# EAGLE board HTVC_NOPWM (EAGLE 7.4.0)
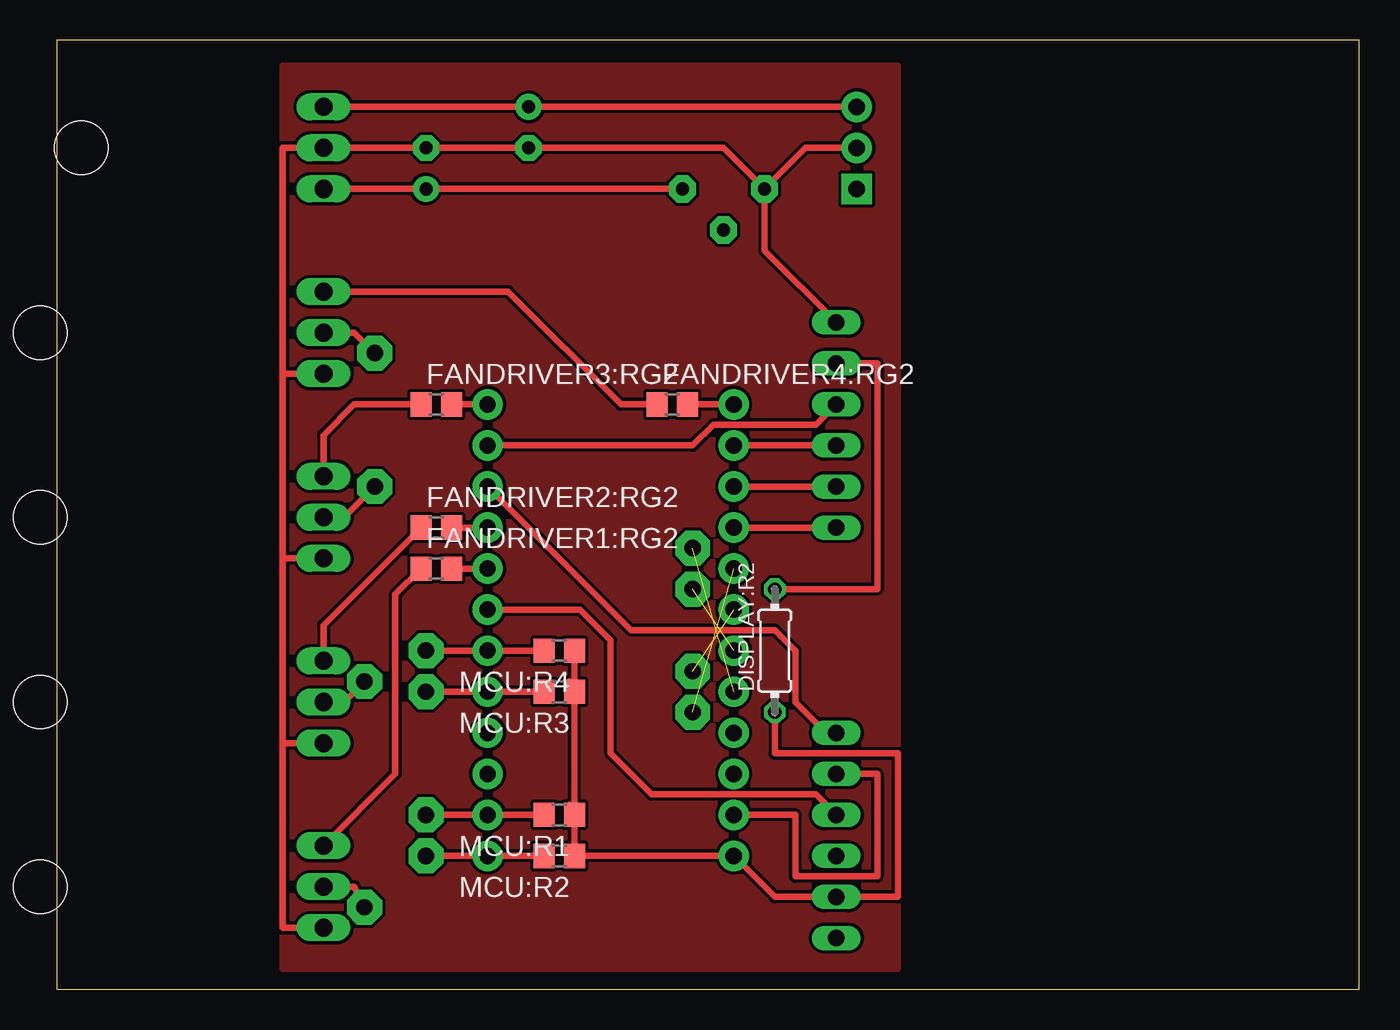
[diagram p0: board, top side]
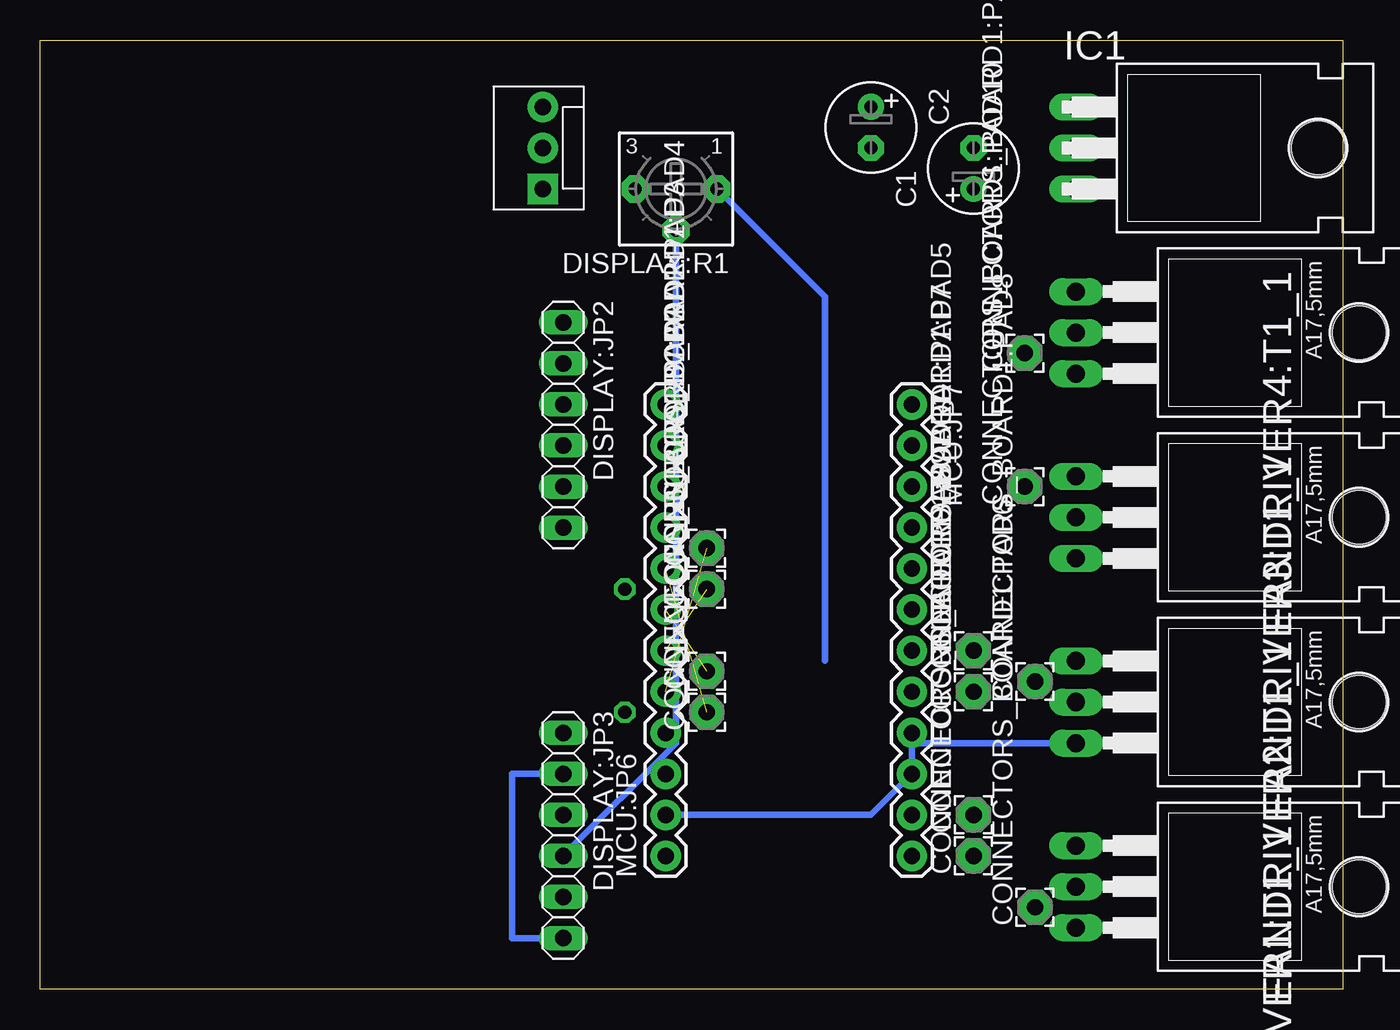
[diagram p1: board, bottom side, seen from below]

Size 80.62 x 58.73 mm. Coordinates in mm from the lower left corner, seen from the top.
Outline: 0,0 80.62,0 80.62,58.73 0,58.73 0,0
Copper layers (1*16): Top 0.035mm / dielectric 1.5mm / Bottom 0.035mm
Design rules "default *": minimum track width 10mil, minimum drill 24mil, track to track 8mil, track to pad 8mil, pad to pad 8mil, via to via 8mil, smd to smd 8mil, copper to edge 40mil, drill to drill 8mil, minimum pad ring 10mil, minimum via ring 8mil, stop-mask expansion 4mil, vias tented up to drill 0mil, thermal gap 10mil

## Footprints (pad centres in the part's own frame; a part is rotated, then mirrored left to right if it is on the bottom)
E2,5-6 = drill 0.813 pad 1.6: + -1.27,0 | drill 0.813 pad 1.6 octagon: - 1.27,0
2,15/1,0 = drill 1.016 pad 2.159 octagon: 1 0,0
1X06 = drill 1.016 long: 1 -6.35,0; 2 -3.81,0; 3 -1.27,0; 4 1.27,0; 5 3.81,0; 6 6.35,0
3362P = drill 0.813 pad 1.676 octagon: 1 -2.54,0; 2 0,2.54; 3 2.54,0
0204/7 = drill 0.813 octagon: 1 -3.81,0; 2 3.81,0
R0805 = smd 1.3 x 1.5: 1 -0.95,0; 2 0.95,0
TO220AH = drill 1.118 long: B -2.54,-6.35; C 0,-6.35; E 2.54,-6.35 | hole 3.302: 0,11.176
TO220H = drill 1.118 long: 1 -2.54,-10.16; 2 0,-10.16; 3 2.54,-10.16 | hole 3.302: 0,4.826
MOLEX-1X3 = drill 1.016 pad 1.88 square: 1 0,0 | drill 1.016 pad 1.88: 2 2.54,0; 3 5.08,0
1X12 = drill 1.016 pad 1.88: 1 0,0; 2 2.54,0; 3 5.08,0; 4 7.62,0; 5 10.16,0; 6 12.7,0; 7 15.24,0; 8 17.78,0; 9 20.32,0; 10 22.86,0; 11 25.4,0; 12 27.94,0

## Placement (x,y rotation side)
C1  0.33uF  [E2,5-6]  29.21,53.34 270 bottom
C2  0.1uF  [E2,5-6]  22.86,50.8 90 bottom
CONNECTORS_BOARD1:PAD1  [2,15/1,0]  39.37,17.14 90 bottom
CONNECTORS_BOARD1:PAD2  [2,15/1,0]  39.37,19.68 90 bottom
CONNECTORS_BOARD1:PAD3  [2,15/1,0]  39.37,24.77 90 bottom
CONNECTORS_BOARD1:PAD4  [2,15/1,0]  39.37,27.3 90 bottom
CONNECTORS_BOARD1:PAD5  [2,15/1,0]  22.86,20.95 90 bottom
CONNECTORS_BOARD1:PAD6  [2,15/1,0]  19.05,5.08 90 bottom
CONNECTORS_BOARD1:PAD7  [2,15/1,0]  22.86,18.41 90 bottom
CONNECTORS_BOARD1:PAD8  [2,15/1,0]  19.05,19.05 90 bottom
CONNECTORS_BOARD1:PAD9  [2,15/1,0]  22.86,8.26 90 bottom
CONNECTORS_BOARD1:PAD10  [2,15/1,0]  19.68,31.11 90 bottom
CONNECTORS_BOARD1:PAD11  [2,15/1,0]  22.86,10.79 90 bottom
CONNECTORS_BOARD1:PAD12  [2,15/1,0]  19.68,39.37 90 bottom
DISPLAY:JP2  [1X06]  48.26,34.92 270 bottom
DISPLAY:JP3  [1X06]  48.26,9.53 270 bottom
DISPLAY:R1  10k  [3362P]  41.27,49.53 180 bottom
DISPLAY:R2  470R  [0204/7]  44.45,20.95 90 top
FANDRIVER1:RG2  1K  [R0805]  23.5,26.04 0 top
FANDRIVER1:T1_1  TIP120  [TO220AH]  10.16,6.35 270 bottom
FANDRIVER2:RG2  1K  [R0805]  23.5,28.57 0 top
FANDRIVER2:T1_1  TIP120  [TO220AH]  10.16,17.78 270 bottom
FANDRIVER3:RG2  1K  [R0805]  23.5,36.2 0 top
FANDRIVER3:T1_1  TIP120  [TO220AH]  10.16,29.21 270 bottom
FANDRIVER4:RG2  1K  [R0805]  38.1,36.2 0 top
FANDRIVER4:T1_1  TIP120  [TO220AH]  10.16,40.64 270 bottom
IC1  7805T  [TO220H]  6.35,52.07 270 bottom
JP1  [MOLEX-1X3]  49.53,49.53 90 bottom
MCU:JP6  [1X12]  41.91,8.26 90 bottom
MCU:JP7  [1X12]  26.67,36.2 270 bottom
MCU:R1  10K  [R0805]  31.11,10.79 180 top
MCU:R2  10K  [R0805]  31.11,8.26 180 top
MCU:R3  10K  [R0805]  31.11,18.41 180 top
MCU:R4  10K  [R0805]  31.11,20.95 180 top

## Library data of the parts
C1 C2 DISPLAY:R2 FANDRIVER1:RG2 FANDRIVER2:RG2 FANDRIVER3:RG2 FANDRIVER4:RG2 MCU:R1-MCU:R4 = rcl
CONNECTORS_BOARD1:PAD1-CONNECTORS_BOARD1:PAD12 = wirepad
DISPLAY:JP2 DISPLAY:JP3 = pinhead
DISPLAY:R1 = nervus
FANDRIVER1:T1_1 FANDRIVER2:T1_1 FANDRIVER3:T1_1 FANDRIVER4:T1_1 = transistor-power
IC1 = linear
JP1 = SparkFun-Connectors
MCU:JP6 MCU:JP7 = SparkFun

## Nets
+5V [+5V]: C2.+ DISPLAY:JP3.5 DISPLAY:R1.1 DISPLAY:R2.1 IC1.3 MCU:JP6.1 MCU:R1.1 MCU:R2.1 MCU:R3.1 MCU:R4.1
A0: CONNECTORS_BOARD1:PAD1.1 MCU:JP6.8
A1: CONNECTORS_BOARD1:PAD2.1 MCU:JP6.7
A2: CONNECTORS_BOARD1:PAD3.1 MCU:JP6.6
A3: CONNECTORS_BOARD1:PAD4.1 MCU:JP6.5
AGND [AGND]: C1.- C2.- DISPLAY:JP2.1 DISPLAY:JP3.2 DISPLAY:JP3.6 DISPLAY:R1.3 FANDRIVER1:T1_1.E FANDRIVER2:T1_1.E FANDRIVER3:T1_1.E FANDRIVER4:T1_1.E IC1.2 JP1.2 MCU:JP6.2 MCU:JP7.9 MCU:JP7.10
DISPLAY:N$1: DISPLAY:JP3.4 DISPLAY:R1.2
DISPLAY:N$2: DISPLAY:JP2.2 DISPLAY:R2.2
FANDRIVER1:N$10: FANDRIVER1:RG2.1 FANDRIVER1:T1_1.B
FANDRIVER2:N$10: FANDRIVER2:RG2.1 FANDRIVER2:T1_1.B
FANDRIVER3:N$10: FANDRIVER3:RG2.1 FANDRIVER3:T1_1.B
FANDRIVER4:N$10: FANDRIVER4:RG2.1 FANDRIVER4:T1_1.B
MCU:5VOUT: MCU:JP6.4
MCU:RESET: MCU:JP6.3
N$1: DISPLAY:JP3.3 MCU:JP7.6
N$2: DISPLAY:JP3.1 MCU:JP7.3
N$3: DISPLAY:JP2.6 MCU:JP6.9
N$4: DISPLAY:JP2.5 MCU:JP6.10
N$5: DISPLAY:JP2.4 MCU:JP6.11
N$6: DISPLAY:JP2.3 MCU:JP7.2
N$9: CONNECTORS_BOARD1:PAD12.1 FANDRIVER4:T1_1.C
N$10: CONNECTORS_BOARD1:PAD10.1 FANDRIVER3:T1_1.C
N$11: CONNECTORS_BOARD1:PAD8.1 FANDRIVER2:T1_1.C
N$12: CONNECTORS_BOARD1:PAD6.1 FANDRIVER1:T1_1.C
N$21: FANDRIVER1:RG2.2 MCU:JP7.5
N$22: FANDRIVER2:RG2.2 MCU:JP7.4
N$23: FANDRIVER3:RG2.2 MCU:JP7.1
N$37: FANDRIVER4:RG2.2 MCU:JP6.12
TACH0: CONNECTORS_BOARD1:PAD5.1 MCU:JP7.7 MCU:R4.2
TACH1: CONNECTORS_BOARD1:PAD7.1 MCU:JP7.8 MCU:R3.2
TACH2: CONNECTORS_BOARD1:PAD9.1 MCU:JP7.12 MCU:R2.2
TACH3: CONNECTORS_BOARD1:PAD11.1 MCU:JP7.11 MCU:R1.2
VCC [VCC]: C1.+ IC1.1 JP1.3

## Tracks (layer width: path | path; a pad name or v marks a point on that pad's centre or on a via)
+5V
  Top 0.406: DISPLAY:R2.1 44.45,14.61 52.07,14.61 52.07,5.71 DISPLAY:JP3.5 44.45,5.71 MCU:JP6.1 MCU:R2.1 MCU:R1.1 | MCU:R1.1 32.06,11.12 31.75,11.43 31.75,11.11 MCU:R1.1 | MCU:R1.1 MCU:R3.1 | MCU:R3.1 32.06,18.73 31.75,19.05 31.75,18.73 MCU:R3.1 | MCU:R3.1 MCU:R4.1 | DISPLAY:R1.1 C2.+ IC1.3
  Bottom 0.406: DISPLAY:R1.1 32.06,42.86 32.06,20.32
_GND
  pour Top: 52.07,57.15 52.07,1.27 13.97,1.27 13.97,57.15
A0  (1 unrouted)
A1  (1 unrouted)
A2  (1 unrouted)
A3  (1 unrouted)
AGND
  Top 0.406: JP1.2 46.35,52.07 DISPLAY:R1.3 | DISPLAY:R1.3 41.27,52.07 C1.- C2.- IC1.2 13.97,52.07 13.97,38.1 | FANDRIVER4:T1_1.E 13.97,38.1 | 13.97,38.1 13.97,26.67 | FANDRIVER3:T1_1.E 13.97,26.67 | 13.97,26.67 13.97,15.24 | FANDRIVER2:T1_1.E 13.97,15.24 | 13.97,15.24 13.97,3.81 FANDRIVER1:T1_1.E | DISPLAY:JP3.2 50.8,13.34 50.8,6.99 45.72,6.99 45.72,10.79 MCU:JP6.2 | DISPLAY:R1.3 43.81,45.72 DISPLAY:JP2.1
  Bottom 0.406: DISPLAY:JP3.6 51.44,3.17 51.44,13.34 DISPLAY:JP3.2 | FANDRIVER2:T1_1.E 26.67,15.24 MCU:JP7.9 MCU:JP7.10 29.21,10.79 MCU:JP6.2
DISPLAY:N$1
  Bottom 0.406: DISPLAY:R1.2 41.27,15.24 DISPLAY:JP3.4
DISPLAY:N$2
  Top 0.406: DISPLAY:JP2.2 50.8,38.73 50.8,24.77 DISPLAY:R2.2
FANDRIVER1:N$10
  Top 0.406: FANDRIVER1:RG2.1 20.95,24.45 20.95,13.34 FANDRIVER1:T1_1.B
FANDRIVER2:N$10
  Top 0.406: FANDRIVER2:RG2.1 16.51,22.54 FANDRIVER2:T1_1.B
FANDRIVER3:N$10
  Top 0.406: FANDRIVER3:RG2.1 18.41,36.2 16.51,34.29 FANDRIVER3:T1_1.B
FANDRIVER4:N$10
  Top 0.406: FANDRIVER4:RG2.1 34.92,36.2 27.94,43.18 FANDRIVER4:T1_1.B
N$1
  Top 0.406: DISPLAY:JP3.3 46.99,12.06 36.83,12.06 34.29,14.61 34.29,21.59 32.38,23.5 MCU:JP7.6
N$2
  Top 0.406: DISPLAY:JP3.1 47.62,15.88 45.72,17.78 45.72,20.95 44.45,22.23 35.56,22.23 MCU:JP7.3
N$3
  Top 0.406: DISPLAY:JP2.6 MCU:JP6.9
N$4
  Top 0.406: DISPLAY:JP2.5 MCU:JP6.10
N$5
  Top 0.406: DISPLAY:JP2.4 MCU:JP6.11
N$6
  Top 0.406: DISPLAY:JP2.3 46.99,34.92 40.64,34.92 39.37,33.66 MCU:JP7.2
N$9
  Top 0.406: CONNECTORS_BOARD1:PAD12.1 18.41,40.64 FANDRIVER4:T1_1.C
N$10
  Top 0.406: CONNECTORS_BOARD1:PAD10.1 17.78,29.21 FANDRIVER3:T1_1.C
N$11
  Top 0.406: CONNECTORS_BOARD1:PAD8.1 17.78,17.78 FANDRIVER2:T1_1.C
N$12
  Top 0.406: CONNECTORS_BOARD1:PAD6.1 18.41,6.35 FANDRIVER1:T1_1.C
N$21
  Top 0.406: MCU:JP7.5 FANDRIVER1:RG2.2
N$22
  Top 0.406: MCU:JP7.4 FANDRIVER2:RG2.2
N$23
  Top 0.406: MCU:JP7.1 FANDRIVER3:RG2.2
N$37
  Top 0.406: MCU:JP6.12 FANDRIVER4:RG2.2
TACH0
  Top 0.406: MCU:R4.2 MCU:JP7.7 CONNECTORS_BOARD1:PAD5.1
TACH1
  Top 0.406: CONNECTORS_BOARD1:PAD7.1 MCU:JP7.8 MCU:R3.2
TACH2
  Top 0.406: MCU:R2.2 MCU:JP7.12 CONNECTORS_BOARD1:PAD9.1
TACH3
  Top 0.406: CONNECTORS_BOARD1:PAD11.1 MCU:JP7.11 MCU:R1.2
VCC
  Top 0.406: JP1.3 C1.+ IC1.1